# EAGLE board Logic_level_converter (EAGLE 6.4)
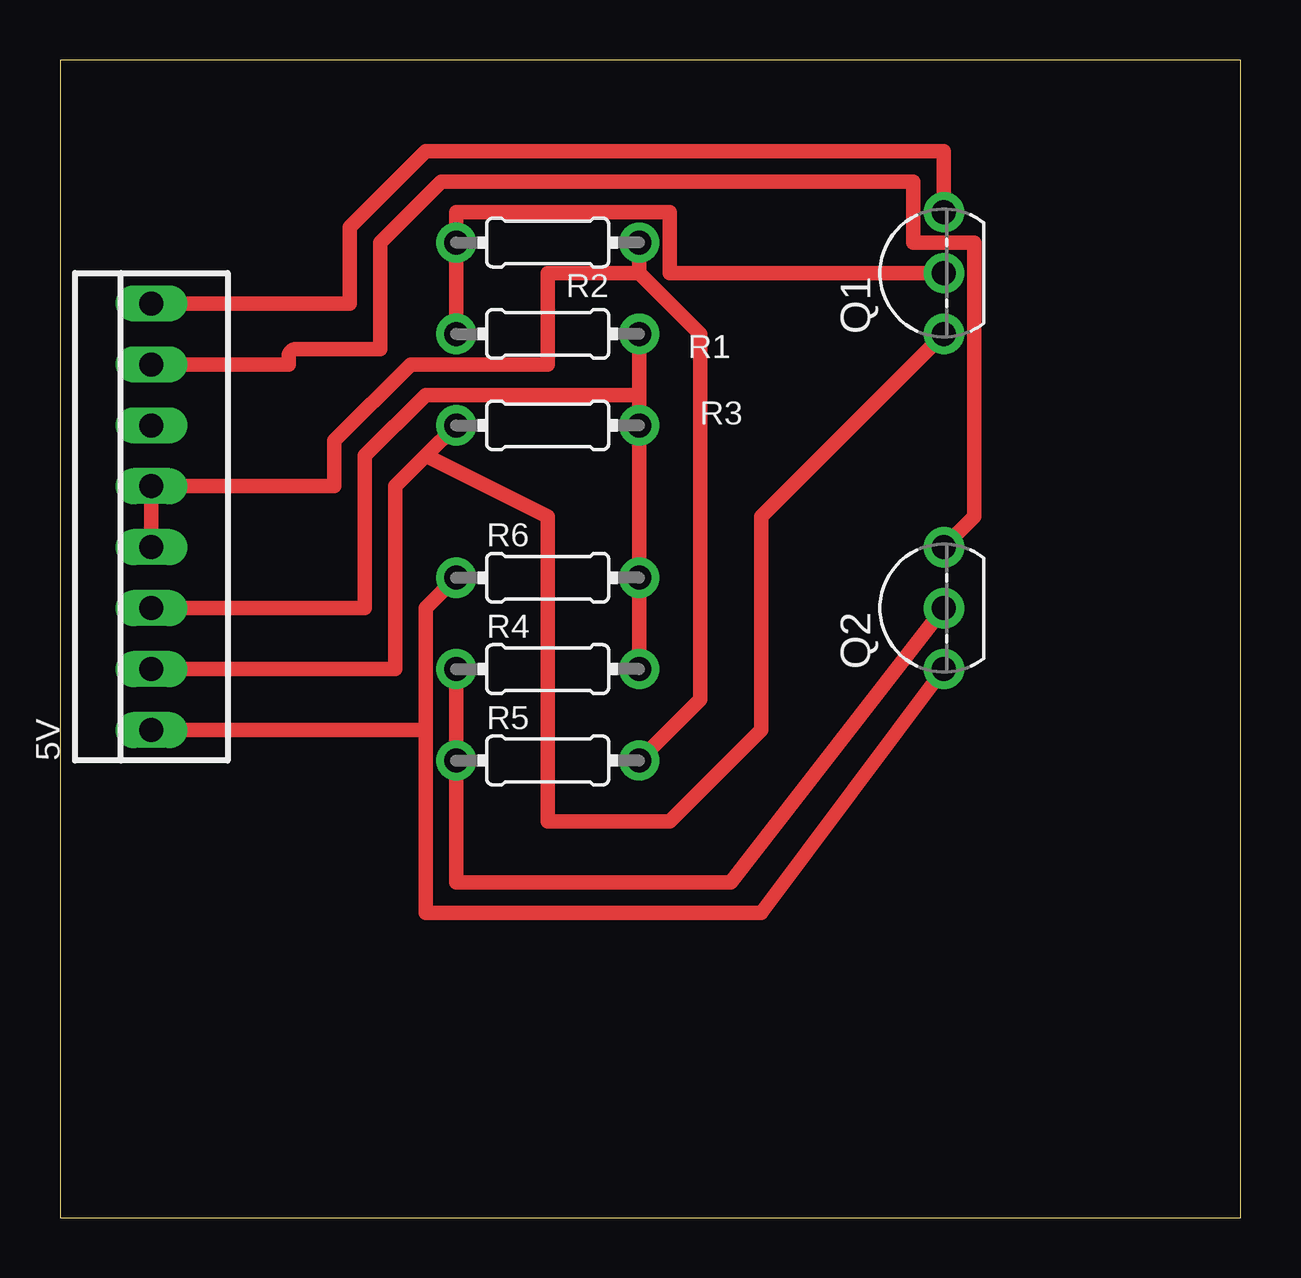
[diagram p0: board, top side]
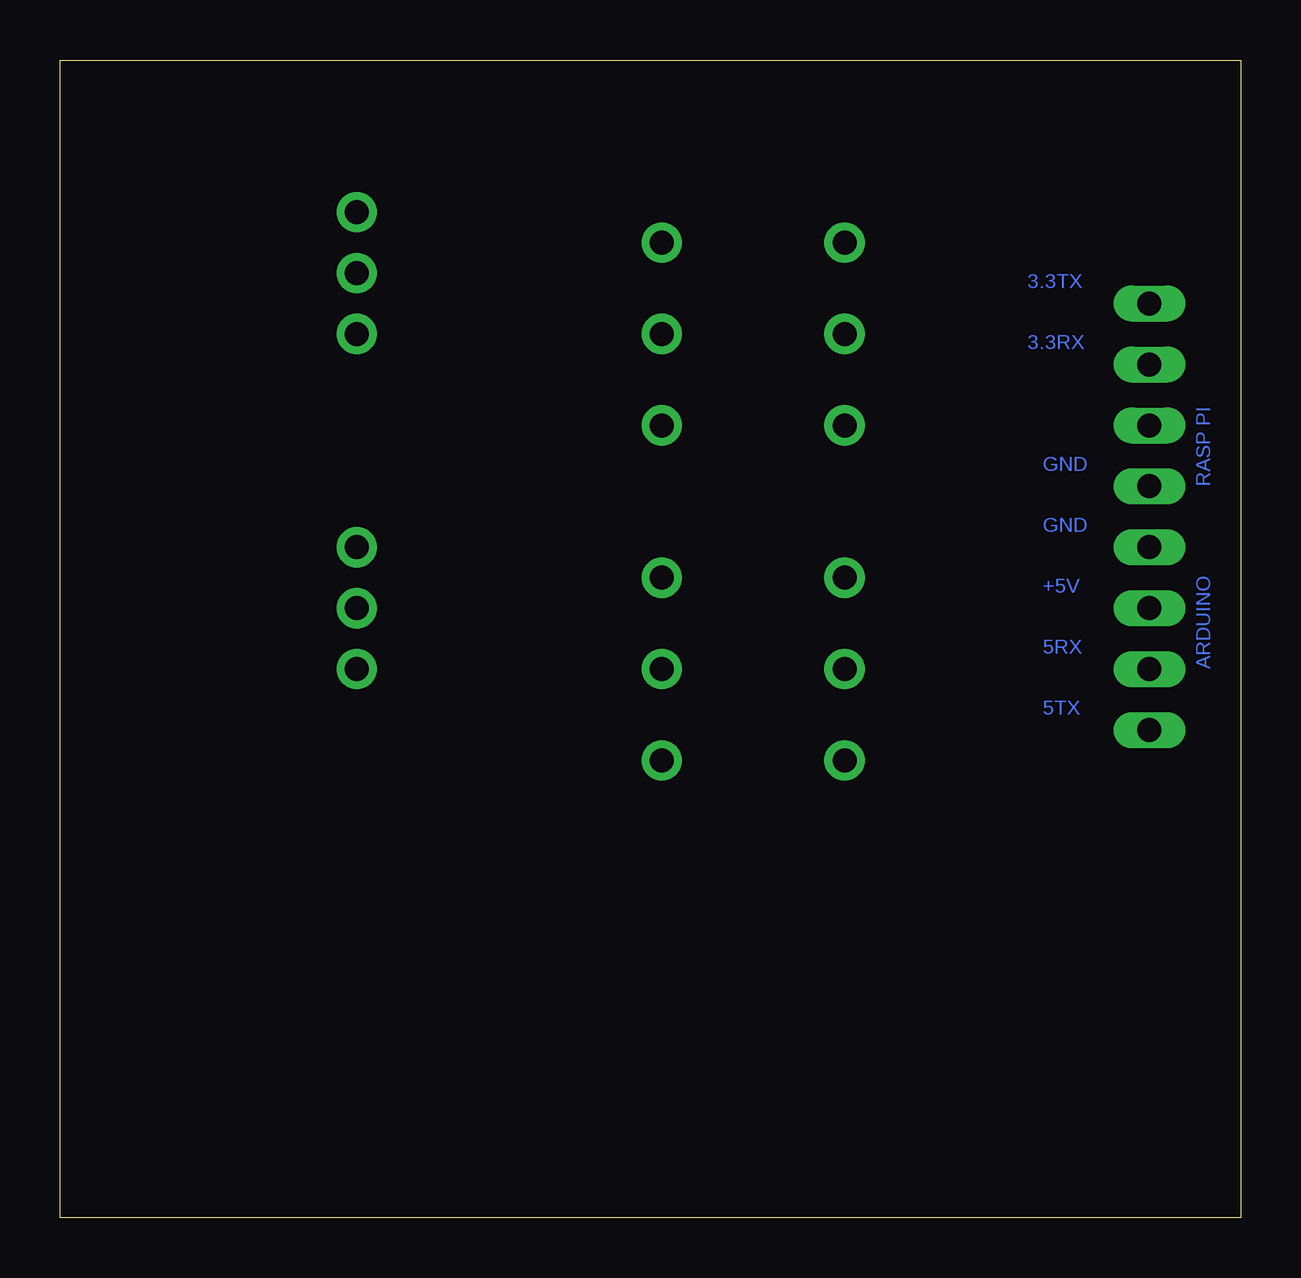
[diagram p1: board, bottom side, seen from below]

Size 49.2 x 48.25 mm. Coordinates in mm from the lower left corner, seen from the top.
Outline: 0,0 49.2,0 49.2,48.25 0,48.25 0,0
Copper layers (1*16): Top 0.035mm / dielectric 1.5mm / Bottom 0.035mm
Design rules "default *": minimum track width 10mil, minimum drill 24mil, track to track 12mil, track to pad 12mil, pad to pad 12mil, via to via 12mil, smd to smd 12mil, copper to edge 60mil, drill to drill 20mil, minimum pad ring 10mil, minimum via ring 8mil, stop-mask expansion 4mil, vias tented up to drill 0mil, thermal gap 10mil

## Footprints (pad centres in the part's own frame; a part is rotated, then mirrored left to right if it is on the bottom)
22-23-2081 = drill 1 long: 1 -8.89,0; 2 -6.35,0; 3 -3.81,0; 4 -1.27,0; 5 1.27,0; 6 3.81,0; 7 6.35,0; 8 8.89,0
TO92- = drill 1 pad 1.676: 1 -2.54,0; 2 0,0; 3 2.54,0
0204/7 = drill 1 pad 1.676: 1 -3.81,0; 2 3.81,0

## Placement (x,y rotation side)
5V  [22-23-2081]  3.81,29.21 90 top
Q1  2N7000  [TO92-]  36.83,39.37 90 top
Q2  2N7000  [TO92-]  36.83,25.4 90 top
R1  4.7k  [0204/7]  20.32,36.83 180 top
R2  10k  [0204/7]  20.32,40.64 180 top
R3  10k  [0204/7]  20.32,33.02 0 top
R4  4.7k  [0204/7]  20.32,22.86 0 top
R5  10k  [0204/7]  20.32,19.05 0 top
R6  10k  [0204/7]  20.32,26.67 0 top

## Library data of the parts
5V = con-molex; OC_FARNELL: unknown; OC_NEWARK: unknown
Q1 Q2 = maxim
R1-R6 = eagle-ltspice

## Nets
N$6: 5V.4 5V.5 R2.1 R5.2
S$1: Q1.2 R1.2 R2.2
S$2: 5V.8 Q1.3
S$3: 5V.2 Q1.1 R3.1
S$5: Q2.2 R4.1 R5.1
S$6: 5V.3 R1.1 R3.2 R4.2 R6.2
S$7: 5V.1 Q2.1 R6.1
S$8: 5V.7 Q2.3

## Tracks (layer width: path | path; a pad name or v marks a point on that pad's centre or on a via)
N$6
  Top 0.61: 5V.4 5V.5 11.43,30.48 11.43,32.38 14.61,35.56 20.32,35.56 20.32,39.37 24.13,39.37 | R5.2 26.67,21.59 26.67,36.83 24.13,39.37 | R2.1 24.13,39.37
S$1
  Top 0.61: R1.2 R2.2 16.51,41.91 25.4,41.91 25.4,39.37 Q1.2
S$2
  Top 0.61: 5V.8 12.06,38.1 12.06,41.28 15.24,44.45 36.83,44.45 Q1.3
S$3
  Top 0.61: 5V.2 13.97,22.86 13.97,30.48 15.24,31.75 | R3.1 15.24,31.75 | Q1.1 29.21,29.21 29.21,20.32 25.4,16.51 20.32,16.51 20.32,29.21 15.24,31.75
S$5
  Top 0.61: R4.1 R5.1 16.51,13.97 27.94,13.97 Q2.2
S$6
  Top 0.61: R4.2 R6.2 R3.2 24.13,34.29 | 5V.3 12.7,25.4 12.7,31.75 15.24,34.29 24.13,34.29 | 24.13,34.29 R1.1
S$7
  Top 0.61: 15.24,20.32 5V.1 | 15.24,20.32 15.24,25.4 R6.1 | Q2.1 29.21,12.7 15.24,12.7 15.24,20.32
S$8
  Top 0.61: 5V.7 9.53,35.56 9.53,35.88 arc-90 9.84,36.2 13.33,36.2 13.33,40.64 15.88,43.18 35.56,43.18 35.56,40.64 38.1,40.64 38.1,29.21 Q2.3

## Text on the board
Bottom: 3.3TX | 3.3RX | GND | RASP PI | GND | +5V | ARDUINO | 5RX | 5TX